# Altium PCB tscnew.PcbDoc
Units mm, origin at the board's own origin, x right, y up, seen from the top; angles counter-clockwise.
Board outline 151 x 86.38 mm, 2 copper layers (Top Layer, Bottom Layer); 69 components, 59 nets, 239 pads, 0 vias.
Unrouted connection lines stored in the file: 14.
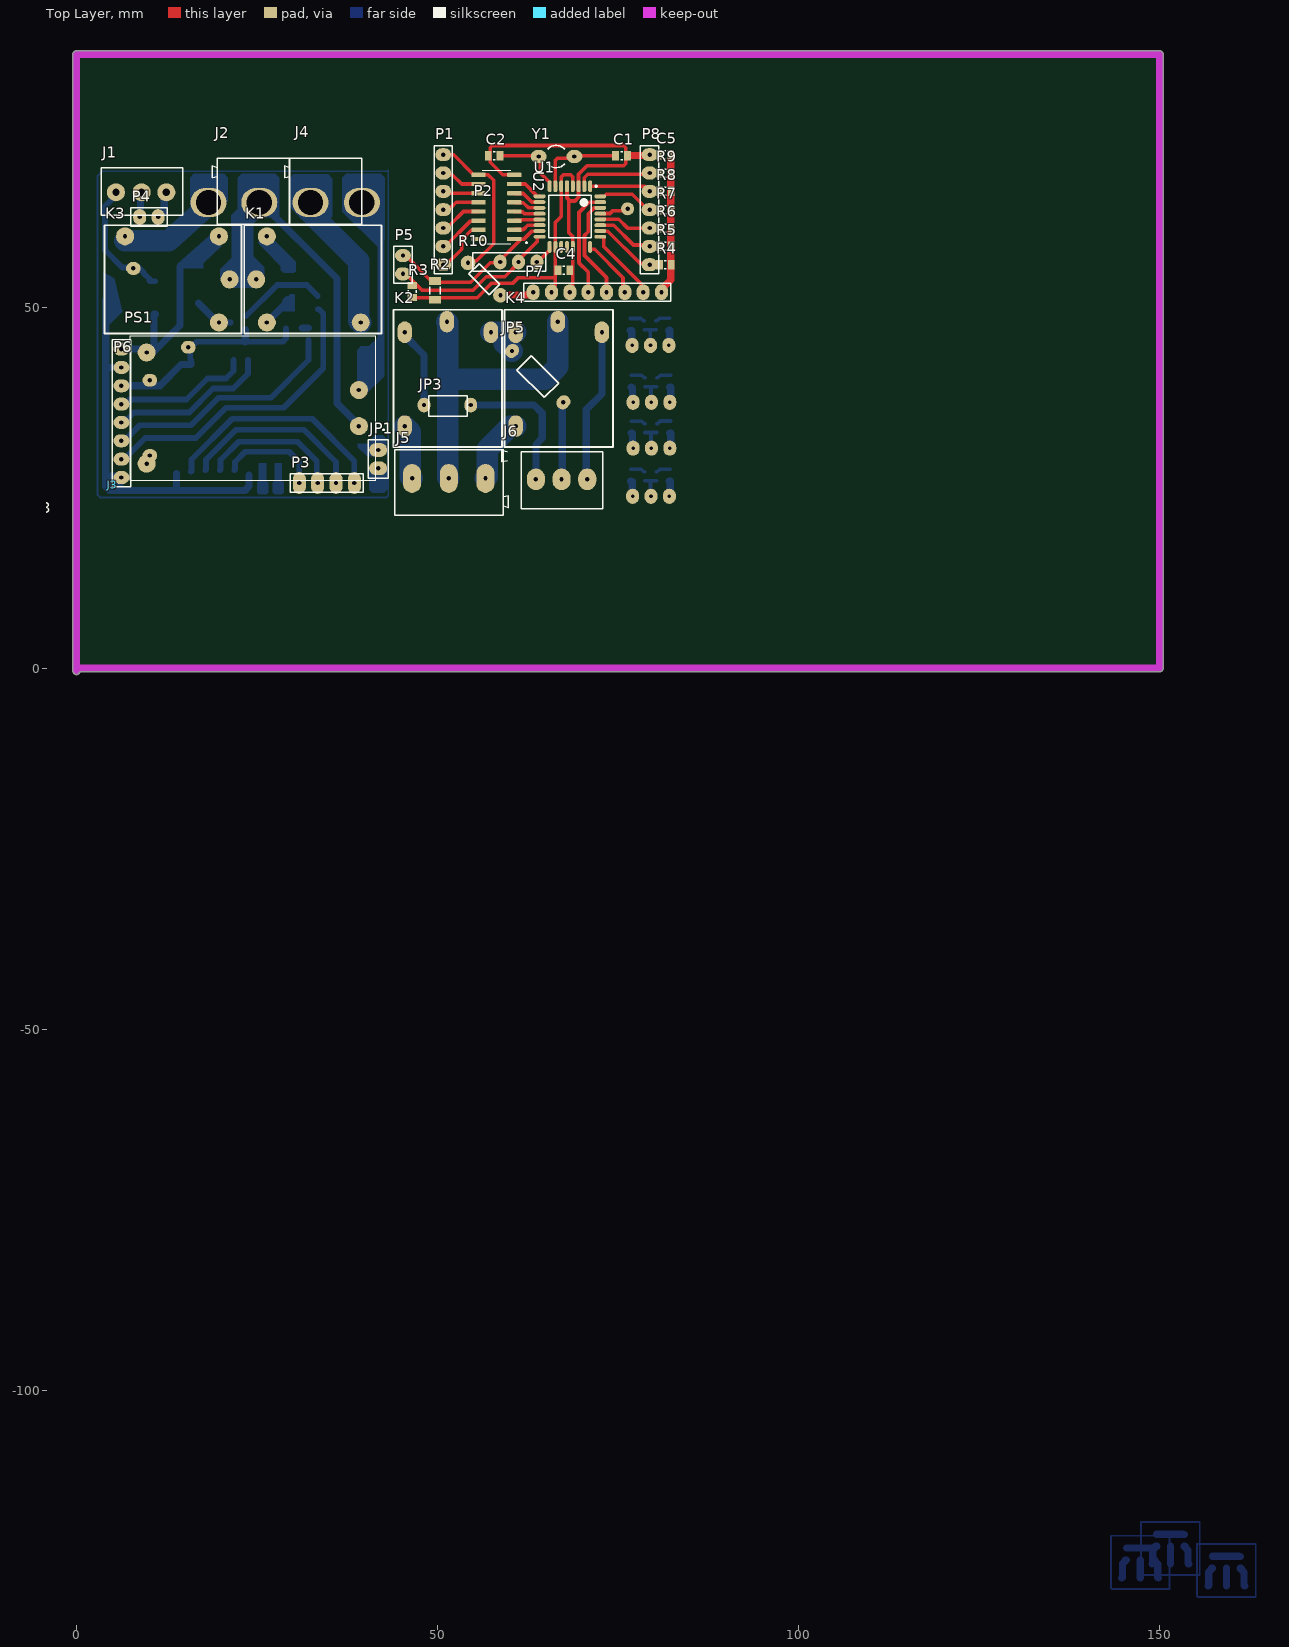
[diagram p0: Top Layer view]
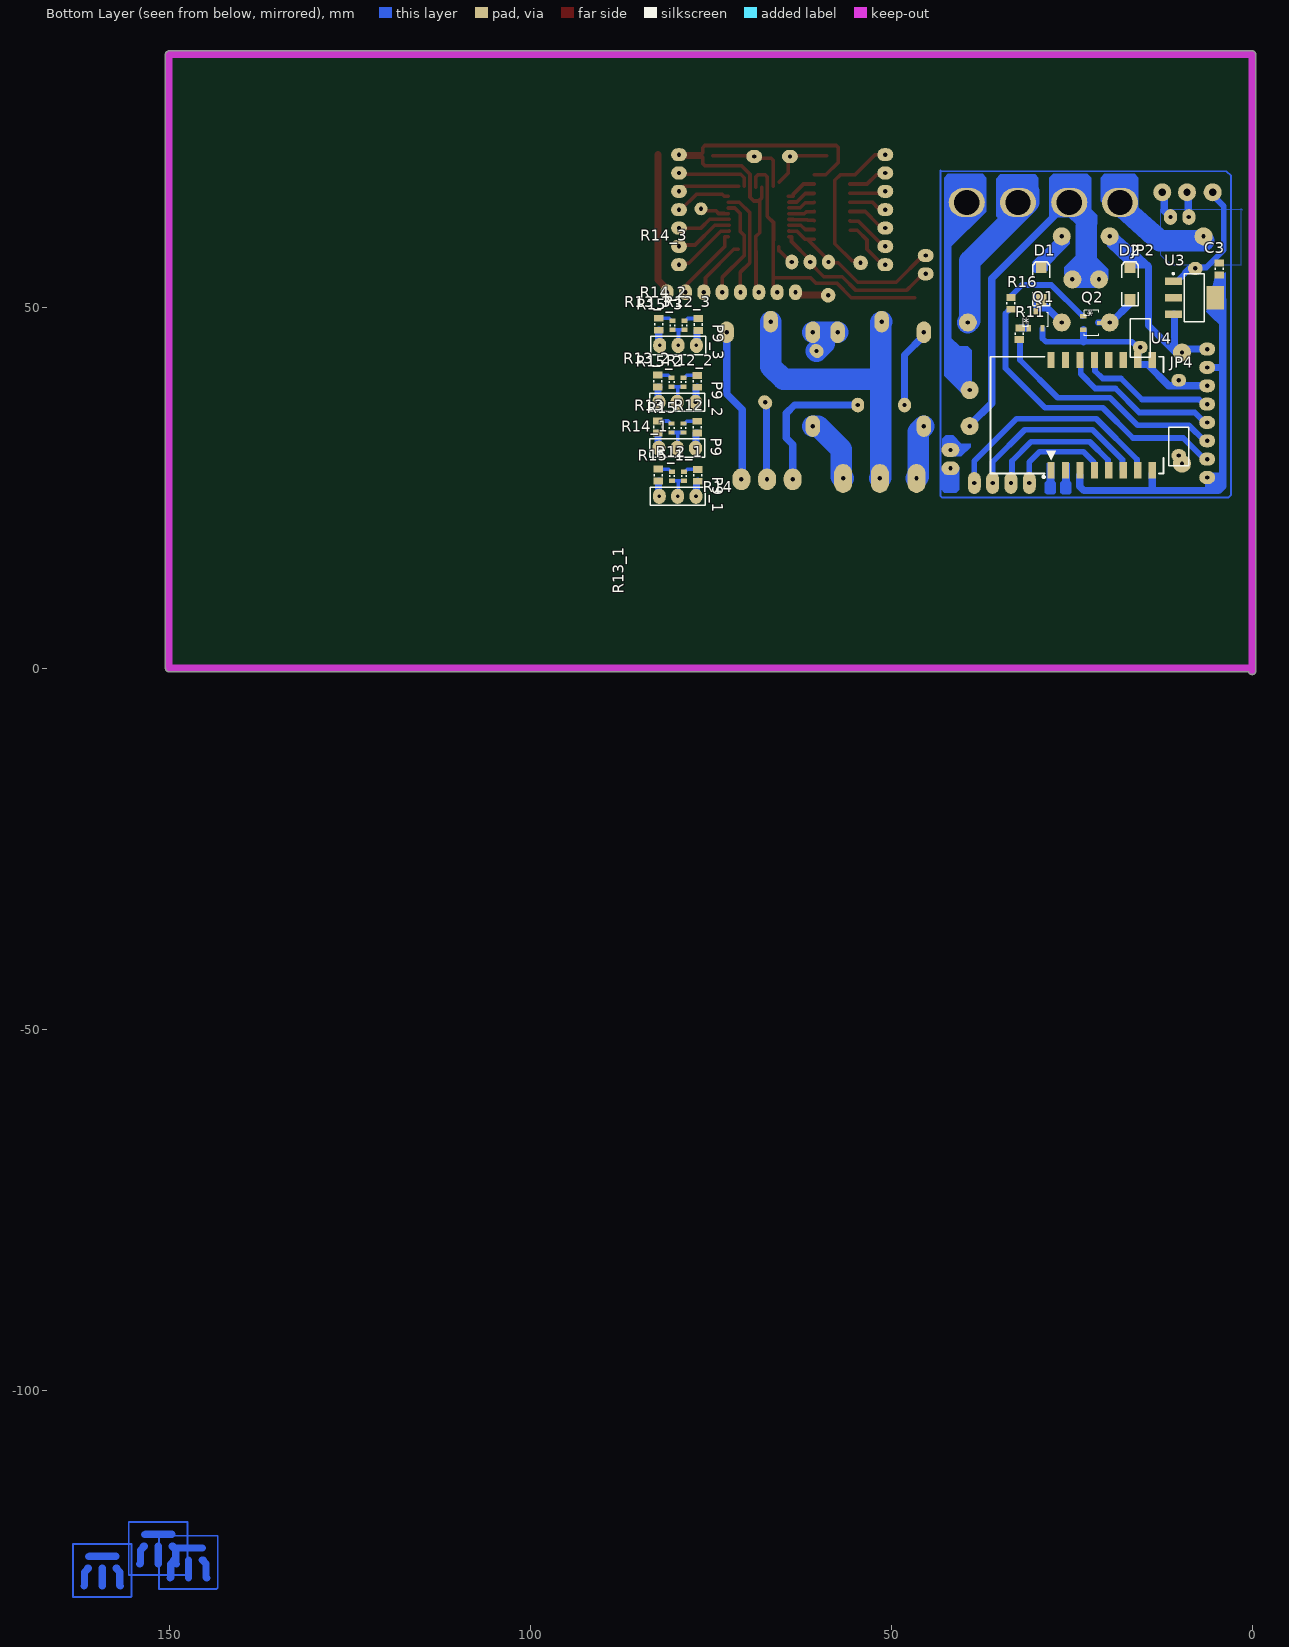
[diagram p1: Bottom Layer view, seen from below]
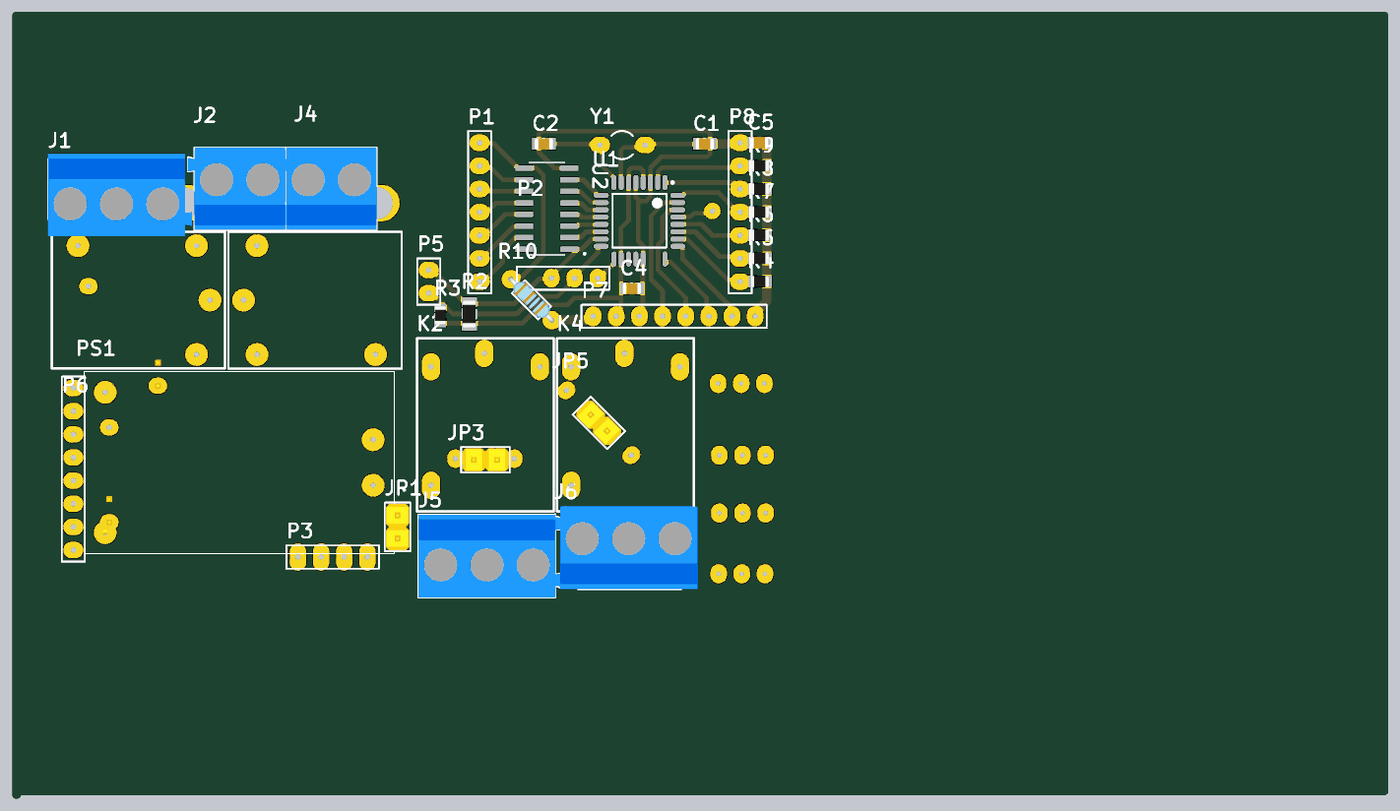
[diagram p2: 3D render of the assembled board from above, using the file's embedded part models]
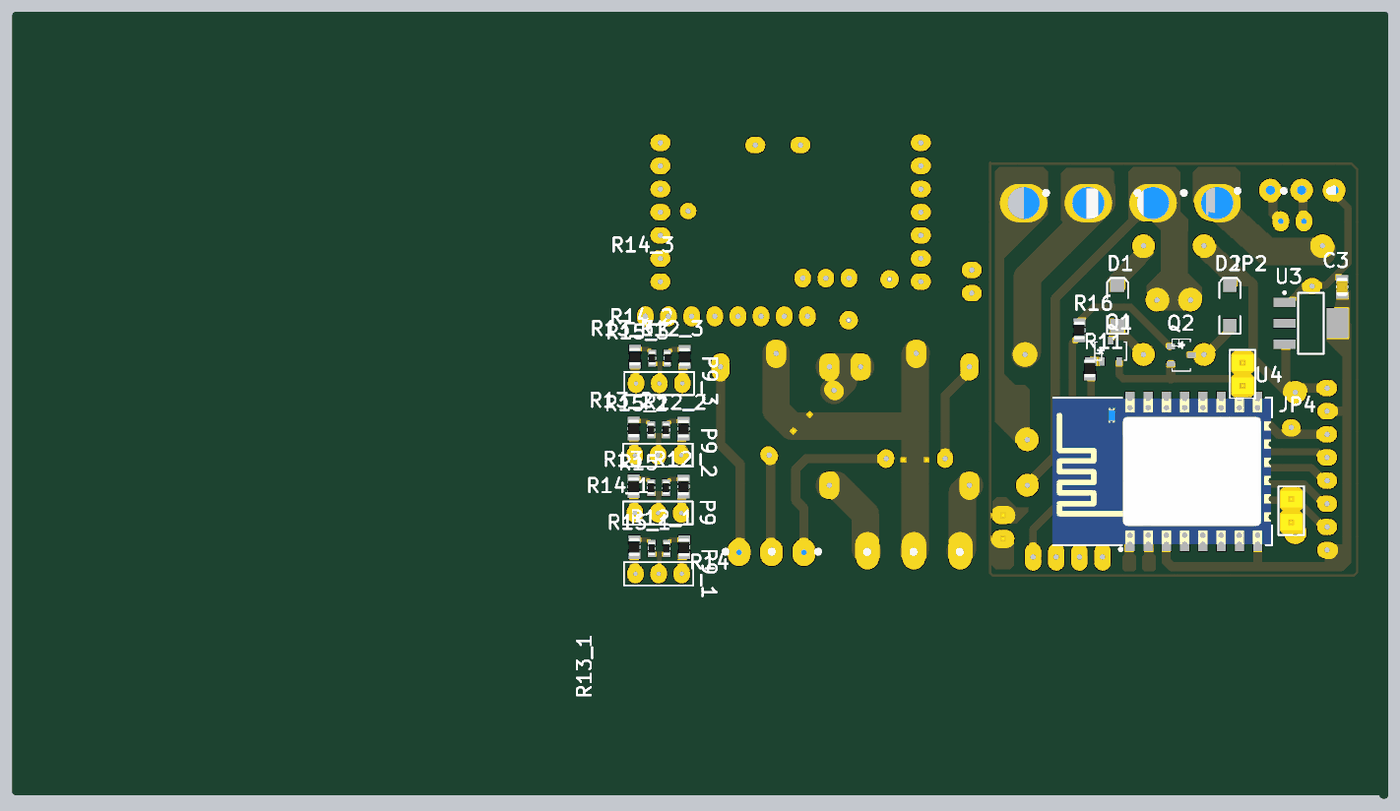
[diagram p3: 3D render of the assembled board from below, using the file's embedded part models]

## Layer stack, top to bottom
Top Solder: solder mask 0.0102, Solder Resist, Dk 3.5
Top Layer: signal copper 0.0356
Dielectric 1: dielectric 0.32, FR-4, Dk 4.8
Bottom Layer: signal copper 0.0356
Bottom Solder: solder mask 0.0102, Solder Resist, Dk 3.5

## Board outline
-0.5,-0.381 -0.5,85 cw(c0,85) 0,85.5 150,85.5 cw(c150,85) 150.5,85 150.5,0 cw(c150,0) 150,-0.5 0.486,-0.5 cw(c0,-0.381)

## Design rules (kind name [scope] priority, off if disabled: settings)
Clearance Clearance_1 [InPolygon] p1: gap=0.8 ignorepadtopadclearanceinfootprint=FALSE
Clearance [All] p2: gap=0.254 ignorepadtopadclearanceinfootprint=FALSE except(0: Arc-Hole Track-Hole SMDPad-Hole THPad-Hole Via-Hole Fill-Hole Poly-Hole Region-Hole Text-Hole)
PolygonConnect [All] p1: connectstyle=Relief reliefconductorwidth=0.254 reliefentries=4 polygonreliefangle="90 Angle" airgapwidth=0.254
RoomDefinition tscnew [InComponentClass('tscnew')] p1: confinementstyle=ConfineIn formatcopy=TRUE lockcomponents=FALSE outline 144.907,-4.953 247.904,-4.953 247.904,23.114 144.907,23.114
RoutingLayers [All] p1: top layer_v5=FALSE bottom layer_v5=TRUE
RoutingVias [All] p1: holewidth=0.711 width=2.5 viastyle="Through Hole" minholewidth=0.711 minwidth=1.27 maxholewidth=0.711 maxwidth=2
SolderMaskExpansion [All] p1: expansion=0.102 istentingtop=FALSE
Width [All] p1: maxlimit=3 minlimit=0.5 preferedwidth=1
29 further rules are at their usual default settings.

## Components (designator, comment, footprint, x,y, rotation, side; value= is the part's Value field where it differs from the comment)
C1 "=Value" "CAP 0805" 75.438,70.993 r180 top
C2 "=Value" "CAP 0805" 57.912,70.993 r0 top
C3 "=Value" "CAP 0805" 4.572,55.372 r90 bottom
C4 "=Value" "CAP 0805" 67.564,55.118 r0 top
C5 "=Value" "CAP 0805" 81.407,71.12 r180 top
D1 "D Tunnel1" 3.2X1.6X1.1 29.21,53.086 r90 bottom
D2 "D Tunnel1" 3.2X1.6X1.1 16.891,53.086 r90 bottom
J1 "TBlock-3" "KF300-3 PIN"#1 16.002,65.913 r270 top
J2 "TBlock-2" "KF300-2 PIN"#1 21.971,65.532 r90 top
J3 "TBlock-4" "KF300-4 PIN" 4.953,25.4 r180 top
J4 "TBlock-2" "KF300-2 PIN"#2 32.004,65.532 r90 top
J5 "TBlock-3" "KF300-3 PIN"#2 56.642,26.289 r270 top
J6 "TBlock-3" "KF300-3 PIN"#3 62.103,26.162 r90 top
JP1 "Jumper" "Header 2X1"#1 41.783,28.956 r90 top
JP2 "Jumper" "Header 2X1"#2 15.494,45.72 r90 bottom
JP3 "Jumper" "Header 2X1"#3 51.435,36.322 r0 top
JP4 "Jumper" "Header 2X1"#4 10.16,30.734 r90 bottom
JP5 "Jumper" "Header 2X1"#5 63.881,40.386 r315 top
K1 "Relay-12vDC" Relays#1 23.241,61.341 r270 top
K2 "Relay-12vDC" Relays#2 58.928,49.657 r180 top
K3 "Relay-12vDC" Relays#1 22.86,46.355 r90 top
K4 "Relay-12vDC" Relays#2 74.295,49.657 r180 top
P1 "Header 7" HDR1X7 50.8,71.12 r270 top
P2 "Header 4" HDR1X4#1 63.754,56.261 r180 top
P3 "Header 4" HDR1X4#2 38.481,25.654 r180 top
P4 "Header 2" HDR1X2 8.763,62.492 r0 top
P5 "Header 2" HDR1X2 45.212,57.15 r270 top
P6 "Header 8" HDR1X8 6.223,26.416 r90 top
P7 "Header 8" HDR1X8 81.026,52.07 r180 top
P8 "Header 7" HDR1X7 79.375,55.88 r90 top
P9 "Header 3" HDR1X3 82.169,30.48 r180 bottom
P9_1 "Header 3" HDR1X3 82.105,23.812 r180 bottom (schematic designator P9)
P9_2 "Header 3" HDR1X3 82.169,36.83 r180 bottom (schematic designator P9)
P9_3 "Header 3" HDR1X3 82.042,44.704 r180 bottom (schematic designator P9)
PS1 "HLK-PM01" HLKPM01 39.116,33.528 r180 top
Q1 "MMBT3904-TP" SOT23-3 31.242,48.26 r180 bottom
Q2 "MMBT3904-TP" SOT23-3 22.218,49.083 r270 bottom
R2 "10K" "RES 1206 (3216X08L)" 49.657,52.324 r90 top
R3 "10K" "RES 0805 (2012X06L)"#1 46.482,52.197 r90 top
R4 "10K" "RES 0805 (2012X06L)"#1 81.534,55.88 r180 top
R5 "10K" "RES 0805 (2012X06L)"#1 81.534,58.42 r180 top
R6 "10K" "RES 0805 (2012X06L)"#1 81.534,60.96 r180 top
R7 "10K" "RES 0805 (2012X06L)"#1 81.534,63.5 r180 top
R8 "10K" "RES 0805 (2012X06L)"#1 81.534,66.04 r180 top
R9 "10K" "RES 0805 (2012X06L)"#1 81.534,68.58 r180 top
R10 "10K" Res-(1/4) 56.474,53.889 r135 top
R11 "10K" "RES 0805 (2012X06L)"#2 32.258,46.355 r90 bottom
R12 "10K" "RES 0805 (2012X06L)"#1 76.835,33.401 r90 bottom
R12_1 "10K" "RES 0805 (2012X06L)"#1 76.772,26.733 r90 bottom (schematic designator R12)
R12_2 "10K" "RES 0805 (2012X06L)"#1 76.835,39.751 r90 bottom (schematic designator R12)
R12_3 "10K" "RES 0805 (2012X06L)"#1 76.708,47.625 r90 bottom (schematic designator R12)
R13 "10K" "RES 0805 (2012X06L)"#1 82.296,33.401 r270 bottom
R13_1 "10K" "RES 0805 (2012X06L)"#1 82.233,26.733 r270 bottom (schematic designator R13)
R13_2 "10K" "RES 0805 (2012X06L)"#1 82.296,39.751 r270 bottom (schematic designator R13)
R13_3 "10K" "RES 0805 (2012X06L)"#1 82.169,47.625 r270 bottom (schematic designator R13)
R14 "10K" "RES 0603 (1608X06L)" 78.74,33.274 r90 bottom
R14_1 "10K" "RES 0603 (1608X06L)" 78.676,26.607 r90 bottom (schematic designator R14)
R14_2 "10K" "RES 0603 (1608X06L)" 78.74,39.624 r90 bottom (schematic designator R14)
R14_3 "10K" "RES 0603 (1608X06L)" 78.613,47.498 r90 bottom (schematic designator R14)
R15 "10K" "RES 0603 (1608X06L)" 80.391,33.274 r90 bottom
R15_1 "10K" "RES 0603 (1608X06L)" 80.328,26.607 r90 bottom (schematic designator R15)
R15_2 "10K" "RES 0603 (1608X06L)" 80.391,39.624 r90 bottom (schematic designator R15)
R15_3 "10K" "RES 0603 (1608X06L)" 80.264,47.498 r90 bottom (schematic designator R15)
R16 "10K" "RES 0805 (2012X06L)"#1 33.401,50.546 r90 bottom
U1 "ATmega8-16AC" 32A_N 68.335,62.554 r270 top
U2 "ULN2003ADRG4" SOIC127P600X175-16N 58.166,63.881 r180 top
U3 "LM1117MP-3.3" MP04A_N 8.001,51.308 r180 bottom
U4 "ESP_12_E" ESP_12_E 27.845,27.047 r90 bottom
Y1 "XTAL" R38 66.421,70.866 r90 top

## Footprints (in the part's own frame and the unit in brackets; to place one, negate y for a bottom-side part, rotate by r counter-clockwise, add the part's x,y. Pads: shape width x height; smd on the part's side, far side on the other; paste and mask are expansions set on the pad)
3.2X1.6X1.1 [mm] "SMT LED; 2 Flat Leads"
  rect 1.5x1.5 smd: 1(-2.032,0) 2(2.413,0)
  silkscreen extent -2.9,-1.15 3.2,1.15
32A_N [mm] "Thin QFP, 32-Leads, Body 7x7mm, Pitch 0.8mm, IPC Medium Density"
  oval 1.65x0.55 smd: 1(-4.2,2.8) 2(-4.2,2) 3(-4.2,1.2) 4(-4.2,0.4) 5(-4.2,-0.4) 6(-4.2,-1.2) 7(-4.2,-2) 8(-4.2,-2.8) 17(4.2,-2.8) 18(4.2,-2) 19(4.2,-1.2) 20(4.2,-0.4) 21(4.2,0.4) 24(4.2,2.8)
  oval 0.55x1.65 smd: 9(-2.8,-4.2) 10(-2,-4.2) 11(-1.2,-4.2) 12(-0.4,-4.2) 13(0.4,-4.2) 14(1.2,-4.2) 15(2,-4.2) 16(2.8,-4.2) 25(2.8,4.2) 26(2,4.2) 27(1.2,4.2) 28(0.4,4.2) 29(-0.4,4.2) 30(-1.2,4.2) 31(-2,4.2) 32(-2.8,4.2)
  silkscreen extent -4.32,-2.95 2.95,3.75, body extent -3.5,-3.5 3.5,3.5, height 1.2
"CAP 0805" [mm]
  rect 0.95x1.3 smd: 1(-0.889,0) 2(0.761,0)
  silkscreen extent -0.21,-0.55 0.09,0.55, body extent -1.08,-0.63 0.95,0.63, height 0.65
ESP_12_E [mm] "ESP-12 Wi-Fi Module by AI-Thinker"
  rect 2.25x1 smd: 1(0.375,0) 2(0.375,-2) 3(0.375,-4) 4(0.375,-6) 5(0.375,-8) 6(0.375,-10) 7(0.375,-12) 8(0.375,-14) 15(15.625,-14) 16(15.625,-12) 17(15.625,-10) 18(15.625,-8) 19(15.625,-6) 20(15.625,-4) 21(15.625,-2) 22(15.625,0)
  silkscreen extent -0.7,-15.57 16.08,8.37, body extent 0,-15.49 16,8.51, height 2.75
HDR1X2 [mm] "Connector; Header; 2 Position"
  oval 1.8x2.2 hole 0.6: 1(0,0) 2(2.54,0)
  silkscreen extent -1.27,-1.27 3.81,1.27
HDR1X3 [mm] "Connector; Header; 3 Position"
  oval 1.8x2.1 hole 0.5: 1(0,0) 2(2.54,0) 3(5.08,0)
  silkscreen extent -1.27,-1.27 6.35,1.27
HDR1X4#1 [mm] "Connector; Header; 4 Position"
  oval 1.8x2.032 hole 0.6: 1(0,0) 2(2.54,0) 3(5.08,0)
  round 1.8 hole 0.6: 4(-12.573,-7.366)
  silkscreen extent -1.27,-1.27 8.89,1.27
HDR1X4#2 [mm] "Connector; Header; 4 Position"
  oval 1.8x3 hole 0.6: 1(0,0) 2(2.54,0) 3(5.08,0) 4(7.62,0)
  silkscreen extent -1.27,-1.27 8.89,1.27
HDR1X7 [mm] "Connector; Header; 7 Position"
  oval 1.8x2.2 hole 0.6: 1(0,0) 2(2.54,0) 3(5.08,0) 4(7.62,0) 5(10.16,0) 6(12.7,0) 7(15.24,0)
  silkscreen extent -1.27,-1.27 16.51,1.27
HDR1X8 [mm] "Connector; Header; 8 Position"
  oval 1.8x2.2 hole 0.6: 1(0,0) 2(2.54,0) 3(5.08,0) 4(7.62,0) 5(10.16,0) 6(12.7,0) 7(15.24,0) 8(17.78,0)
  silkscreen extent -1.27,-1.27 19.05,1.27
"Header 2X1"#1 [mm]
  oval 1.9x2.5 hole 0.6: 1(-1.27,0) 2(1.27,0)
  silkscreen extent -2.67,-1.4 2.67,1.4, body extent -2.54,-1.27 2.54,1.27, height 9.5
"Header 2X1"#2 [mm]
  oval 1.778x2.032 hole 0.6: 1(-1.27,0) 2(9.652,-7.62)
  silkscreen extent -2.67,-1.4 2.67,1.4, body extent -2.54,-1.27 2.54,1.27, height 9.5
"Header 2X1"#3 [mm]
  oval 1.778x2.032 hole 0.6: 1(-3.302,0.127) 2(3.175,0.127)
  silkscreen extent -2.67,-1.4 2.67,1.4, body extent -2.54,-1.27 2.54,1.27, height 9.5
"Header 2X1"#4 [mm]
  oval 1.778x2.032 hole 0.6: 1(-1.27,0) 2(9.144,0)
  silkscreen extent -2.67,-1.4 2.67,1.4, body extent -2.54,-1.27 2.54,1.27, height 9.5
"Header 2X1"#5 [mm]
  oval 1.778x2.032 hole 0.6: 1(-5.029,0) 2(5.029,0)
  silkscreen extent -2.67,-1.4 2.67,1.4, body extent -2.54,-1.27 2.54,1.27, height 9.5
HLKPM01 [mm]
  round 2.5 hole 0.6: 1(0,0) 2(0,-5) 3(29.4,5.2) 4(29.4,-10.2)
  silkscreen extent -3.5,-12.5 31.7,7.5
"KF300-2 PIN"#1 [mm]
  oval 4x5 hole 3.5: 1(-1.032,3.683) 2(-1.032,-3.35)
  silkscreen extent -4.06,-7.49 5.08,3.18, body extent -3.99,-7.5 5.08,3.24, height 12.52
"KF300-2 PIN"#2 [mm]
  oval 4x5 hole 3.5: 1(-1.032,-0.417) 2(-1.032,-7.517)
  silkscreen extent -4.06,-7.49 5.08,3.18, body extent -3.99,-7.5 5.08,3.24, height 12.52
"KF300-3 PIN"#1 [mm]
  round 2.5 hole 1: 1(0,-3.556) 2(0,-6.985) 3(0,-10.541)
  silkscreen extent -3.43,-12.57 3.18,-1.27, body extent -4,-12.57 5.07,3.25, height 12.78
"KF300-3 PIN"#2 [mm]
  oval 4x2.5 hole 0.6: 1(0,0) 2(0,-5.08) 3(0,-10.16)
  silkscreen extent -4.06,-12.57 5.08,3.18, body extent -4,-12.57 5.07,3.25, height 12.78
"KF300-3 PIN"#3 [mm]
  oval 3x2.5 hole 0.6: 1(0,-1.524) 2(0,-5.08) 3(0,-8.636)
  silkscreen extent -4.06,-10.79 4.05,3.18, body extent -4,-12.57 5.07,3.25, height 12.78
"KF300-4 PIN" [mm]
MP04A_N [mm] "SOT223, 4-Leads, Body 6.5x3.5mm, Pitch 2.3mm, Lead Span 7mm, IPC Medium Density"
  rect 2.4x1 smd: 1(-2.9,2.3) 2(-2.9,0) 3(-2.9,-2.3)
  rect 2.4x3.3 smd: 4(2.9,0)
  silkscreen extent -3.03,-3.35 1.4,3.47, body extent -1.85,-3.35 1.85,3.35, height 1.8
R38 [mm] "Crystal, Thru-Hole; 2 Leads; Body 3.1 x 8.2 mm (Dia.xH)"
  oval 1.8x2.2 hole 0.6: 1(0,2.413) 2(0,-2.54)
  silkscreen extent -1.55,-1.19 1.55,1.17
Relays#1 [mm]
  round 2.5 hole 0.6: 1(7.493,1.651) 3(13.462,16.129) 4(1.524,3.127) 5(13.462,3.127)
  silkscreen extent 0,0 15,19
Relays#2 [mm]
  oval 2x3 hole 0.6: 1(7.62,1.651) 3(13.462,16.129) 4(1.524,3.127) 5(13.462,3.127)
  silkscreen extent 0,0 15,19
"RES 0603 (1608X06L)" [mm] "Chip Resistor, 2-Leads, Body 1.6x0.8mm, IPC High Density _ (0.063W)"
  rect 0.6x0.85 smd: 1(-0.635,0) 2(0.609,0)
  silkscreen extent -0.11,-0.33 0.09,0.33, body extent -0.77,-0.38 0.75,0.38, height 0.45
"RES 0805 (2012X06L)"#1 [mm] "Chip Resistor, 2-Leads, Body 2.0x1.3mm, IPC High Density _ (0.100 W)"
  rect 0.95x1.3 smd: 1(-0.838,0) 2(0.812,0)
  silkscreen extent -0.16,-0.55 0.14,0.55, body extent -1.03,-0.63 1,0.64, height 0.6
"RES 0805 (2012X06L)"#2 [mm] "Chip Resistor, 2-Leads, Body 2.0x1.3mm, IPC High Density _ (0.100 W)"
  rect 0.95x1.3 smd: 1(-0.838,0) 2(0.762,-0.127)
  silkscreen extent -0.16,-0.55 0.14,0.55, body extent -1.03,-0.63 1,0.64, height 0.6
"RES 1206 (3216X08L)" [mm] "Chip Resistor, 2-Leads, Body 3.2x1.6mm, IPC High Density _ (0.125 W)"
  rect 1.05x1.7 smd: 1(-1.295,0) 2(1.301,0)
  silkscreen extent -0.5,-0.75 0.5,0.75, body extent -1.52,-0.76 1.53,0.76, height 0.6
Res-(1/4) [mil]
  round 80 hole 23.62: 1(-125,0) 2(125,0)
  silkscreen extent -80,-40 80,40, body extent -135,-36 135,36, height 115
SOIC127P600X175-16N [mm]
  rrect25% 1.97x0.6 smd: 1(-2.475,4.445) 2(-2.475,3.175) 3(-2.475,1.905) 4(-2.475,0.635) 5(-2.475,-0.635) 6(-2.475,-1.905) 7(-2.475,-3.175) 8(-2.475,-4.445) 9(2.475,-4.445) 10(2.475,-3.175) 11(2.475,-1.905) 12(2.475,-0.635) 13(2.475,0.635) 14(2.475,1.905) 15(2.475,3.175) 16(2.475,4.445)
  silkscreen extent -4.25,-5.06 1.95,5.06
SOT23-3 [mm]
  rect 0.6x0.9 smd: 1(0.32,-1.15) 2(2.22,-1.15) 3(1.27,1.15)
  silkscreen extent -0.48,-1 3.02,1

## Part data
C1 C2 C3 C4 C5: library part Capacitor, "Capacitor"
D1 D2: "Tunnel Diode - RLC Model", LatestRevisionDate=17-Jul-2002, LatestRevisionNote="Re-released for DXP Platform.", PackageDescription="SM LED; 2 Flat Leads", PackageReference=3.2X1.6X1.1, PackageVersion=Feb-2002, Published=8-Jun-2000, Publisher="Altium Limited"
K1 K2 K3 K4: library part Relay-05vDC, "Relay-05vDC-240AC 5A", ComponentLinkURL=www.picpars.com, Designer="Seyed Mohsen Ghasemain"
P1 P8: "Header, 7-Pin", LatestRevisionDate=17-Jul-2002, LatestRevisionNote="Re-released for DXP Platform.", Publisher="Altium Limited"
P2 P3: "Header, 4-Pin", LatestRevisionDate=17-Jul-2002, LatestRevisionNote="Re-released for DXP Platform.", Publisher="Altium Limited"
P4 P5: "Header, 2-Pin", LatestRevisionDate=17-Jul-2002, LatestRevisionNote="Re-released for DXP Platform.", Publisher="Altium Limited"
P6 P7: "Header, 8-Pin", LatestRevisionDate=17-Jul-2002, LatestRevisionNote="Re-released for DXP Platform.", Publisher="Altium Limited"
P9 P9_1 P9_2 P9_3: "Header, 3-Pin", LatestRevisionDate=17-Jul-2002, LatestRevisionNote="Re-released for DXP Platform.", Publisher="Altium Limited"
PS1: "<b>Ultra-compact power module</b><p> Source: <a href=\"https://datasheet.lcsc.com/szlcsc/1906201102_HI-LINK-HLK-PM03_C209904.pdf\"> Datasheet </a>", Package="Package Analog Devices", Availability=Unavailable, MF=Hi-link, MP=hlk-pm01, Price=None, SnapEDA_Link=https://www.snapeda.com/parts/hlk-pm01/Hi-link/view-part/2875605/?ref=snap
Q1 Q2: "Bipolar _BJT_ Transistor NPN 40V 200mA 300MHz 350mW Surface Mount SOT-23", Package="SOT-23 Micro Commercial", Availability=Unavailable, MF="Micro Commercial", MP=MMBT3904-TP, Price=None, SnapEDA_Link=https://www.snapeda.com/parts/MMBT3904-TP/Micro%20Commercial/view-part/805928/?ref=snap
R2 R3 R4 R5 R6 R7 R8 R9 R10 R11 R12 R12_1 R12_2 R12_3 R13 R13_1 R13_2 R13_3 R14 R14_1 R14_2 R14_3 R15 R15_1 R15_2 R15_3 R16: library part Resistor, "Resistor", Power="1/4 W", Tolerance=5%
U1: "8-Bit AVR Microcontroller with 8K Bytes of In-System Programmable Flash Memory", Supplier Part Number 1=ATMEGA8-16AC-ND, Code_JEDEC=MS-026-ABA, ComponentLink1Description=Datasheet, ComponentLink1URL=http://www.atmel.com/dyn/resources/prod_documents/doc2486.pdf, ComponentLink2Description="Atmel.com Home", ComponentLink2URL=http://www.atmel.com, DatasheetVersion=2486H-AVR-09/02, LatestRevisionDate=16-Oct-2006, LatestRevisionNote="IPC-7351 Footprint Added.", PackageDescription="32-Lead, 7x7x1.0 mm Body, 0.8mm Lead Pitch, Thin Profile Plastic Quad Flat Package (TQFP)", PackageReference=32A, PackageVersion="revB, Oct-2001", Published=17-Sep-2003, Publisher="Altium Limited", Supplier 1=Digi-Key, Supplier 2=Mouser, Supplier Part Number 2=556-ATMEGA8-16AC
U2: "50-V, 7-ch darlington transistor array, -20C to 70C 16-SOIC -40 to 70", Package=None, Availability=Unavailable, MP=ULN2003ADRG4, Price=None
U3: "800mA Low-Dropout Linear Regulator", DigiKeyPartNumber=LM1117MP-3.3CT-ND, Manufacturer="National Semiconductor", PackageTopMarking=XYTT*N05A, PowerWise=N, Code_IPC=SOT223-4, Code_JEDEC=TO-261-AA, ComponentLink1Description="LM1117 Datasheet", ComponentLink1URL=http://www.national.com/ds/LM/LM1117.pdf, ComponentLink2Description="LM1117 Web Page", ComponentLink2URL=http://www.national.com/pf/LM/LM1117.html, ComponentLink3Description="MP04A Package Page", ComponentLink3URL=http://www.national.com/packaging/folders/mp04a.html, CompType="LDO IC", DatasheetVersion=Apr-2006, PackageDescription="Molded SOT-223, 6.50 x 3.56 x 1.6mm Body, 4 Lead, 2.3mm Pitch", PackageReference=MP04A, PackageVersion="revB, Apr-2003", PartNumber=LM1117MP-3.3, PinCount=4, Published=4-Dec-2008, Publisher="Altium Limited", RoHS=O
U4: "ESP-12 Wi-Fi Module by AI-Thinker", IC=ESP8266-EX, Vendor=Ai-thinker
Y1: "Crystal Oscillator", LatestRevisionDate=17-Jul-2002, LatestRevisionNote="Re-released for DXP Platform.", PackageDescription="Crystal, Thru-Hole; 2 Leads; Body 3.1 x 8.2 mm (Dia.xH)", PackageReference=R38, Published=8-Jun-2000, Publisher="Altium Limited"

## Nets (pads, with @x,y where several pads share a name; then routed paths per layer and width w, separated by ;. In a path a pad name is that pad's centre, name@x,y a point inside that pad or via, vN(x,y) a via of type N, cw(c..) or ccw(c..) an arc to the next point about the centre after c; other vN are vias at no path point)
btn: U4.18
faz: J2.2 K1.1 K3.1 PS1.1 | length 47.1
  Bottom Layer w1: 22.422,61.661 22.422,62.511 ; 22.479,61.722 24.43,63.673 24.43,63.884 25.024,64.478 25.565,64.478 36.068,53.975 36.068,36.703 38.989,33.782 PS1.1@39.116,33.782
  Bottom Layer w3: 22.987,55.626 22.987,61.095
GND: C1.1 C2.1 C3.2 C4.2 C5.2 J1.3 JP2.1 JP2.2 JP4.1 JP4.2 P6.6 P7.6 P8.7 PS1.3 Q1.2 Q2.2 U1.3 U1.5 U1.21 U2.8 U3.1 U4.15 U4.16 | length 105.1
  Top Layer w0.5: U2.8 59.055,68.326 57.299,70.082 57.299,70.993 57.299,72.097 57.592,72.39 75.78,72.39 76.073,72.097 76.073,71.422 76.327,71.168 C1.1 76.102,70.768 76.102,70.329 76.073,70.3 76.073,69.889 75.78,69.596 70.717,69.596 69.535,68.414 U1.3 69.535,65.217 69.031,64.713 68.355,64.713 67.935,65.133 U1.5@67.935,66.627 ; P7.6@68.199,52.07 68.702,52.573 68.702,53.124 68.707,53.129 68.707,57.474 68.714,57.481 68.714,57.748 68.725,57.759 68.725,58.344 U1.21 68.725,58.364 68.725,59.799 68.199,60.325 68.199,64.869
  Top Layer w1: C1.1@76.454,70.993 79.248,70.993 P8.7
  Bottom Layer w0.8: J1.3 5.461,65.496 3.937,63.972 3.937,57.912 6.35,55.499 7.944,55.499 8.011,55.432 8.692,55.432 9.331,54.793 9.331,54.677 10.101,53.907 10.101,53.708 10.201,53.608 U3.1 ; U4.16 15.745,42.772 15.745,44.32 16.637,45.212 23.368,45.212 28.566,45.212 29.035,45.681 Q1.2@29.035,47.06
  Bottom Layer w1: P6.6 11.557,39.116 14.488,42.047 15.845,42.047 U4.16@15.845,42.428 ; PS1.3@9.582,28.194 PS1.3 ; 23.368,45.212 Q2.2
i13: P8.6 R9.2 U1.2 | length 10.4
  Top Layer w0.5: U1.2 70.345,66.764 70.345,67.932 70.807,68.394 79.294,68.394 P8.6@79.353,68.453
i14: P8.5 R8.2 U1.1 | length 8.5
  Top Layer w0.5: U1.1 78.661,66.754 P8.5
i15: P8.4 R7.2 U1.32 | length 7.9
  Top Layer w0.5: U1.32 73.098,65.354 73.403,65.659 76.962,65.659 79.121,63.5 P8.4
i16: P8.3 R6.2 U1.28 | length 7.5
  Top Layer w0.5: U1.28@72.423,62.164 73.108,62.164 73.12,62.175 75.112,62.175 76.327,60.96 P8.3
i17: P8.2 R5.2 U1.27 | length 8.2
  Top Layer w0.5: U1.27@72.395,61.344 73.13,61.344 73.133,61.341 74.422,61.341 77.148,58.615 79.18,58.615 P8.2
i18: P8.1 R4.2 U1.26 | length 8.9
  Top Layer w0.5: U1.26@72.433,60.564 72.452,60.544 73.13,60.544 73.141,60.533 73.579,60.533 78.037,56.075 79.18,56.075 P8.1
NetC1_2: C1.2 U1.7 Y1.2 | length 12.2
  Top Layer w0.5: U1.7 66.325,66.764 66.325,67.349 66.314,67.36 66.314,70.319 66.607,70.612 68.239,70.612 68.493,70.866 Y1.2 69.088,70.993 C1.2
NetC2_2: C2.2 U1.8 Y1.1 | length 8.9
  Top Layer w0.5: C2.2@58.927,70.993 63.159,70.993 63.54,70.612 Y1.1@64.008,70.612 ; Y1.1@64.008,70.358 64.247,70.119 64.247,68.578 65.496,67.329 U1.8@65.512,67.314
NetD1_1: D1.1 K1.5 Q1.3 | length 4.4
  Bottom Layer w1: K1.5 28.96,50.471 28.96,50.804 D1.1
NetD2_1: D2.1 K3.4 Q2.3 | length 5.6
  Bottom Layer w0.8: K3.4@19.79,47.94 19.856,47.874 21.068,47.874 Q2.3@21.379,47.874
  Bottom Layer w1: D2.1@16.891,50.546 19.558,47.879 K3.4
NetJ5_1: J5.1 K4.3 | length 9.4
  Bottom Layer w3: J5.1 56.892,26.539 56.892,30.349 60.071,33.528 K4.3
NetJ5_2: J5.2 K2.1 K4.1 | length 44
  Bottom Layer w3: K2.1 51.435,47.879 51.435,40.005 ; J5.2 51.435,26.416 51.435,40.005 ; K4.1 66.675,41.783 64.897,40.005 51.435,40.005
NetJ5_3: J5.3 K2.3 | length 7.7
  Bottom Layer w3: K2.3 46.232,32.762 46.232,26.539 J5.3
NetJ6_1: J6.1 JP3.2 | length 19.9
  Bottom Layer w1: JP3.2 63.373,36.449 64.516,35.306 64.516,31.877 63.627,30.988 J6.1
NetJ6_2: J6.2 JP5.2 | length 10.8
  Bottom Layer w1: J6.2 67.265,26.244 67.265,36.658 JP5.2
NetJ6_3: J6.3 K4.4 | length 21
  Bottom Layer w1: J6.3@70.612,26.416 70.612,35.814 72.771,37.973 K4.4
NetJP3_1: JP3.1 K2.5 | length 11.2
  Bottom Layer w1: K2.5 45.466,46.03 48.133,43.363 JP3.1
NetJP5_1: JP5.1 K2.4 K4.5 | length 4.9
  Bottom Layer w3: K2.4 K4.5 ; 59.285,44.982 JP5.1
NetP2_1: P2.1 U1.17 | length 3
  Top Layer w0.5: P2.1 63.881,56.261 65.414,57.794 65.512,57.794 65.535,57.818 U1.17
NetP3_1: P3.1 U4.7 | length 33.2
  Bottom Layer w0.8: U4.7@15.875,27.217 15.945,27.287 15.945,28.899 21.59,34.544 32.639,34.544 38.481,28.702 P3.1@38.481,24.535
NetP3_2: P3.2 U4.6 | length 26
  Bottom Layer w0.8: U4.6 17.945,27.522 17.945,28.867 22.098,33.02 31.496,33.02 35.941,28.575 P3.2
NetP3_3: P3.3 U4.5 | length 20.2
  Bottom Layer w0.8: U4.5 19.945,27.522 19.945,28.835 22.479,31.369 30.607,31.369 33.274,28.702 P3.3@33.274,25.396
NetP3_4: P3.4 U4.4 | length 14.9
  Bottom Layer w0.8: U4.4 21.945,27.522 21.945,28.549 23.368,29.972 29.464,29.972 30.861,28.575 P3.4@30.861,24.958
NetP9_1: P9.1 R13.2 | length 2.3
  Bottom Layer w1: P9.1 82.296,30.607 R13.2@82.296,32.564 ; R13.2@82.169,32.564 82.194,32.589 R13.2
NetP9_2: P9.2 R14.1 R15.1 | length 3.8
  Bottom Layer w0.5: R14.1 79.566,32.639 ; P9.2 79.566,30.543 79.566,32.639 ; R15.1 79.566,32.639
NetP9_3: P9.3 R12.1 | length 2.2
  Bottom Layer w1: R12.1 76.873,32.563 R12.1@76.898,32.538 ; R12.1@77.025,32.538 77.025,30.543 P9.3
NetQ1_1: Q1.1 R11.2 | length 0.9
  Bottom Layer w1: 31.242,47.11 32.124,47.11 R11.2
NetQ2_1: Q2.1 R16.2 | length 12.3
  Bottom Layer w0.8: Q2.1@23.49,48.763 27.813,53.086 31.877,53.086 R16.2@33.401,51.562
NetR12_2: R12.2 R14.2 | length 2
  Bottom Layer w0.5: R12.2 78.286,34.213 78.615,33.883 R14.2
NetR13_1: R13.1 R15.2 | length 2.1
  Bottom Layer w0.5: R15.2 80.516,33.883 80.872,34.239 R13.1
nol: J4.2 PS1.2 | length 29.4
  Bottom Layer w1: J4.2@39.497,65.913 42.164,63.246 42.164,40.687 PS1.2@40.005,38.528
o1: P2.3 P5.1 P6.2 R2.2 R16.1 U1.15 U2.1 | length 65.9
  Top Layer w0.5: P5.1 45.593,57.15 49.276,53.467 50.673,53.467 54.61,53.467 57.317,56.174 58.587,56.174 P2.3 58.674,56.515 60.325,58.166 U2.1@61.461,59.301 ; U2.1 61.461,59.436 61.976,59.436 63.084,60.544 64.125,60.544 U1.15
  Bottom Layer w0.8: P6.2@6.246,29.15 6.798,29.15 9.525,31.877 16.51,31.877 20.701,36.068 28.702,36.068 34.163,41.529 34.163,49.121 33.576,49.708 R16.1
o2: P2.2 P5.2 P6.3 R3.2 R11.1 U1.16 | length 56.9
  Top Layer w0.5: P5.2 45.593,54.61 46.94,53.263 47.879,52.324 54.864,52.324 56.769,54.229 59.309,54.229 61.214,56.134 61.214,56.515 63.794,59.095 63.794,59.731 63.817,59.754 U1.16
  Bottom Layer w0.8: P6.3 6.604,31.496 8.763,33.655 15.875,33.655 19.685,37.465 26.924,37.465 32.131,42.672 R11.1@32.131,45.442
o3: U1.9 U2.7 | length 4.4
  Top Layer w0.5: U2.7 62.133,67.056 63.575,65.613 63.575,65.377 U1.9@64.244,65.377
o4: U1.10 U2.6 | length 4
  Top Layer w0.5: U2.6 60.688,65.739 61.896,65.739 63.071,64.564 64.125,64.564 U1.10
o5: U1.11 U2.5 | length 3.8
  Top Layer w0.5: U2.5 60.688,64.469 61.896,64.469 62.601,63.764 64.125,63.764 U1.11
o6: U1.12 U2.4 | length 3.6
  Top Layer w0.5: U2.4 60.691,63.196 61.772,63.196 62.024,62.944 64.125,62.944 U1.12
o7: U1.13 U2.3 | length 3.6
  Top Layer w0.5: U2.3 60.691,62.026 61.562,62.026 61.669,62.133 63.529,62.133 63.54,62.144 64.125,62.144 U1.13
o8: U1.14 U2.2 | length 3.8
  Top Layer w0.5: U2.2 60.691,60.756 61.899,60.756 62.497,61.354 U1.14
o13: P1.2 U2.10 | length 5.5
  Top Layer w0.5: P1.2 51.017,68.363 52.033,68.363 53.34,67.056 U2.10
o14: P1.3 U2.11 | length 5
  Top Layer w0.5: P1.3 51.071,66.04 51.325,65.786 U2.11
o15: P1.4 U2.12 | length 5.3
  Top Layer w0.5: P1.4 51.049,63.749 51.811,63.749 52.578,64.516 U2.12
o16: P1.5 U2.13 | length 5.8
  Top Layer w0.5: P1.5 51.268,60.96 51.739,61.431 51.779,61.431 53.594,63.246 U2.13
o17: P1.6 U2.14 | length 6.4
  Top Layer w0.5: P1.6 51.054,58.42 54.56,61.926 55.641,61.926 U2.14
o18: P1.7 U2.15 | length 7.6
  Top Layer w0.5: P1.7 51.181,55.88 53.34,58.039 53.34,59.309 54.687,60.656 U2.15@55.641,60.656
q1: P6.5 P7.5 U1.31 U4.19 | length 34
  Top Layer w0.5: P7.5@70.866,52.197 70.866,54.864 69.596,56.134 69.596,63.119 71.031,64.554 U1.31
  Bottom Layer w0.8: P6.5 6.694,36.576 7.329,37.211 15.24,37.211 18.161,40.132 20.701,40.132 21.745,41.176 21.745,42.648 U4.19@21.795,42.697
q2: P6.4 P7.4 U1.30 U4.20 | length 36.6
  Top Layer w0.5: U1.30 72.525,63.744 71.674,63.744 70.866,62.937 70.866,60.452 70.356,59.942 70.356,57.152 73.406,54.102 P7.4
  Bottom Layer w0.8: P6.4 6.556,34.036 7.953,35.433 15.621,35.433 18.923,38.735 21.717,38.735 23.749,40.767 U4.20@23.749,42.671
q3: P7.3 U1.24 | length 8
  Top Layer w0.5: U1.24@71.158,58.007 71.787,58.007 75.697,54.097 75.697,52.446 P7.3@75.824,52.319
q4: P7.2 U1.25 | length 10.1
  Top Layer w0.5: U1.25@72.535,59.775 73.001,59.775 73.045,59.731 73.045,58.4 78.237,53.208 78.237,52.446 P7.2@78.364,52.319
q11: J4.1 K1.3 | length 21.7
  Bottom Layer w3: J4.1@30.943,66.067 30.943,64.561 39.116,56.388 39.116,48.133 K1.3
q12: J2.1 K3.3 | length 14.6
  Bottom Layer w3: K3.3@6.731,59.182 12.755,59.182 17.78,63.666 J2.1@17.78,65.532
rst: P2.4 U1.29 U4.1 | length 3.9
  Top Layer w0.5: U1.29 72.545,62.964 73.13,62.964 73.141,62.975 73.897,62.975 74.3,63.378 75.726,63.378 P2.4@76.073,63.725
s1: J1.1 P4.2 | length 4
  Bottom Layer w1: P4.2@11.303,62.357 P4.2 12.159,63.348 12.159,65.626 J1.1
s2: J1.2 P4.1 | length 3.7
  Bottom Layer w1: P4.1@8.763,62.357 8.859,62.453 8.859,65.755 J1.2
VCC: D1.2 D2.2 K1.4 K3.5 P1.1 P6.8 P7.8 PS1.4 R10.1 R10.2 U2.9 U3.3 | length 61
  Top Layer w0.5: P1.1 50.819,71.101 52.231,71.101 54.991,68.341 57.008,68.341 57.785,67.564 57.785,58.801 55.411,56.427 54.522,56.427 R10.2
  Top Layer w1: R10.1@58.799,51.689 62.387,51.689 62.415,51.717 63.02,51.717 P7.8@63.373,52.07
  Bottom Layer w1: P6.8 9.731,44.196 10.199,43.728 10.605,43.728 PS1.4@10.753,43.876 ; U3.3 10.753,49.008 PS1.4@10.753,43.876 ; K3.5@19.177,59.944 14.351,55.637 14.351,49.022 14.337,49.008 14.337,47.46 PS1.4@10.753,43.876 ; K1.4 26.575,59.61 26.575,58.134 D1.2@28.575,56.134
vesp: C3.1 C4.1 C5.1 P6.1 P6.7 P7.1 P7.7 R2.1 R3.1 R4.1 R5.1 R6.1 R7.1 R8.1 R9.1 U1.4 U1.6 U1.18 U3.2 U3.4 U4.3 U4.8 | length 114
  Top Layer w0.5: R3.1@46.736,51.308 50.673,51.308 55.499,51.308 57.531,53.34 60.452,53.34 61.214,54.102 66.314,54.102 ; P7.7@65.659,52.341 66.314,52.996 66.314,54.102 ; U1.18@66.314,58.404 66.314,54.102 ; U1.18 66.325,58.364 66.325,58.949 66.314,58.96 66.314,59.227 66.294,59.247 66.294,61.722 67.145,62.573 67.145,66.744 U1.6 67.135,67.318 67.156,67.339 67.156,68.033 67.449,68.326 68.442,68.326 68.735,68.033 U1.4@68.735,66.627
  Top Layer w1: P7.1 81.026,52.486 82.296,53.756 C5.1
  Bottom Layer w0.5: 6.223,24.595 P6.1
  Bottom Layer w1: U3.4@4.064,51.082 4.064,41.656 ; P6.7 4.064,41.656 ; U4.8@13.845,26.933 13.845,26.504 13.843,26.502 13.843,24.595 ; U4.3@23.876,26.741 23.876,25.181 23.29,24.595 13.843,24.595 ; 4.064,41.656 4.064,25.181 4.65,24.595 6.223,24.595 13.843,24.595
pads on no net: JP1.1 JP1.2 P9_1.1 P9_1.2 P9_1.3 P9_2.1 P9_2.2 P9_2.3 P9_3.1 P9_3.2 P9_3.3 R12_1.1 R12_1.2 R12_2.1 R12_2.2 R12_3.1 R12_3.2 R13_1.1 R13_1.2 R13_2.1 R13_2.2 R13_3.1 R13_3.2 R14_1.1 R14_1.2 R14_2.1 R14_2.2 R14_3.1 R14_3.2 R15_1.1 R15_1.2 R15_2.1 R15_2.2 R15_3.1 R15_3.2 U1.19 U1.20 U2.16 U4.2 U4.17 U4.21 U4.22
copper on no net: | length 335.9
  Bottom Layer w0.254: 2.921,24.003 2.921,68.199 3.556,68.834 43.053,68.834 43.18,68.961 43.18,68.834 43.18,23.876 42.926,23.622 3.302,23.622 2.921,24.003 ; 143.256,-127.381 143.256,-120.142 143.51,-120.142 151.384,-120.142 151.384,-127.508 143.383,-127.508 143.256,-127.381 ; 147.447,-125.476 147.447,-118.237 147.701,-118.237 155.575,-118.237 155.575,-125.603 147.574,-125.603 147.447,-125.476 ; 155.194,-128.524 155.194,-121.285 155.448,-121.285 163.322,-121.285 163.322,-128.651 155.321,-128.651 155.194,-128.524
  Bottom Layer w0.5: 76.708,48.437 78.159,48.437 78.488,48.107 78.613,48.107 ; 76.772,27.545 78.222,27.545 78.551,27.216 78.676,27.216 ; 76.835,40.563 78.286,40.563 78.615,40.233 78.74,40.233 ; 78.613,46.863 79.438,46.863 ; 78.676,25.971 79.502,25.971 ; 78.74,38.989 79.566,38.989 ; 79.502,44.704 79.438,44.767 79.438,46.863 ; 79.566,23.812 79.502,23.876 79.502,25.971 ; 79.629,36.83 79.566,36.893 79.566,38.989 ; 80.264,46.863 79.438,46.863 ; 80.264,48.107 80.389,48.107 80.745,48.463 82.169,48.463 ; 80.328,25.971 79.502,25.971 ; 80.328,27.216 80.453,27.216 80.808,27.572 82.233,27.572 ; 80.391,38.989 79.566,38.989 ; 80.391,40.233 80.516,40.233 80.872,40.589 82.296,40.589
  Bottom Layer w1: 76.708,46.787 76.746,46.787 76.772,46.762 ; 76.772,25.895 76.81,25.895 76.835,25.87 ; 76.835,38.913 76.873,38.913 76.898,38.888 ; 76.898,46.762 76.898,44.767 76.962,44.704 ; 76.962,25.87 76.962,23.876 77.025,23.812 ; 77.025,38.888 77.025,36.893 77.089,36.83 ; 82.042,44.704 82.169,44.831 82.169,46.788 ; 82.042,46.788 82.067,46.813 82.169,46.813 ; 82.105,23.812 82.233,23.939 82.233,25.897 ; 82.105,25.897 82.131,25.922 82.233,25.922 ; 82.169,36.83 82.296,36.957 82.296,38.914 ; 82.169,38.914 82.194,38.939 82.296,38.939 ; 144.78,-125.984 144.876,-125.888 144.876,-124.033 145.265,-123.644 145.265,-123.519 145.29,-123.494 145.415,-123.494 ; 145.415,-121.844 149.074,-121.844 149.1,-121.87 149.225,-121.87 ; 147.32,-125.984 147.32,-123.52 ; 148.971,-124.079 149.067,-123.983 149.067,-122.128 149.456,-121.739 149.456,-121.614 149.481,-121.589 149.606,-121.589 ; 149.225,-123.52 149.35,-123.52 149.375,-123.545 149.375,-123.67 149.764,-124.06 149.764,-125.888 149.86,-125.984 ; 149.606,-119.939 153.265,-119.939 153.291,-119.965 153.416,-119.965 ; 151.511,-124.079 151.511,-121.615 ; 153.416,-121.615 153.541,-121.615 153.566,-121.64 153.566,-121.765 153.955,-122.155 153.955,-123.983 154.051,-124.079 ; 156.718,-127.127 156.814,-127.031 156.814,-125.176 157.203,-124.787 157.203,-124.662 157.228,-124.637 157.353,-124.637 ; 157.353,-122.987 161.012,-122.987 161.038,-123.013 161.163,-123.013 ; 159.258,-127.127 159.258,-124.663 ; 161.163,-124.663 161.288,-124.663 161.313,-124.688 161.313,-124.813 161.702,-125.203 161.702,-127.031 161.798,-127.127

## Polygon pours and split planes (outlines as drawn)
faz on Bottom Layer "NONET_L02_P003" (solid, shelved, pour order 3): 1.397,63.5 12.7,63.5 12.7,57.277 11.303,55.88 1.524,55.88 1.524,63.627
no net on Bottom Layer "NONET_L02_P001" (solid, pour order 1): 6.985,67.691

## Keep-outs
Keep-Out Layer:
  lines w1: 0,-0.381 0,22.86 0,67.945 0,85 150,85 150,0 0,0

## Other copper
Bottom Layer:
  region: 38.989,30.607 40.259,29.337 42.037,29.337 42.037,29.591 42.926,30.48 42.926,31.75 42.418,32.258 41.402,32.258 40.259,31.115 38.989,31.115
  region: 39.37,31.115
  region: 43.116,27.749 43.116,24.828 42.608,24.32 40.957,24.32 40.576,24.701 40.576,27.877
  region net vesp: 4.191,27.051 6.477,27.051 6.477,24.849 6.223,24.595 6.18,24.638 4.318,24.638
  region net q12: 15.748,67.945 16.256,68.453 20.32,68.453 15.748,63.647
  region net NetD1_1: 28.956,51.181 29.591,51.816 30.226,51.816 30.226,49.443 28.154,49.443
  region net VCC: 26.162,57.912 25.273,58.801 25.273,59.182 25.4,59.182 26.924,60.706 27.432,60.198 27.432,59.182 30.353,56.261 30.353,54.991 30.099,54.737 28.702,54.737 28.321,55.118 28.321,55.645
  region net q12: 20.955,67.945 20.955,64.643 18.923,62.611 16.51,62.103 16.764,68.453 20.447,68.453
  region net faz: 27.051,64.643 27.051,62.484 25.4,62.484 24.384,61.468 21.463,61.468 21.463,62.738 23.368,64.643
  region: 25.019,66.929
  region net faz: 28.067,62.584 28.067,67.945 27.559,68.453 22.86,68.453 22.307,67.9 22.307,62.402
  region: 25.4,63.373
  region net q11: 35.433,62.62 35.433,67.818 34.869,68.382 30.028,68.382 29.591,67.945 29.591,63.881 32.004,61.468 34.455,61.468
  region net nol: 41.783,59.69 41.783,58.293 36.83,63.246 36.83,67.945 37.338,68.453 42.164,68.453 42.672,67.945 42.672,59.309 42.545,59.309 41.688,60.166
  region net nol: 39.243,62.611
  region: 25.273,28.384 26.289,28.384 26.289,25.971 26.543,25.717 26.543,24.32 26.289,24.066 25.273,24.066 25.019,24.32 25.019,25.717 25.273,25.971
  region net rst: 27.432,28.384 28.448,28.384 28.448,25.971 28.702,25.717 28.702,24.32 28.448,24.067 27.432,24.066 27.178,24.321 27.178,25.717 27.432,25.971
  region net nol: 38.862,38.185 38.862,44.069 39.37,44.577 40.513,44.577 41.783,45.847 42.164,45.466 42.164,40.687 42.498,40.687 42.672,40.513 39.751,37.592
  region net faz: 26.035,54.356 26.035,54.61 25.654,54.229 25.654,53.213 25.019,53.213 24.511,52.705 21.082,52.705 19.939,53.848 19.939,55.245 22.225,57.531 24.003,57.531 26.035,55.499 26.035,54.229
  region net VCC: 13.97,55.372 17.589,55.372 17.59,56.07 20.066,58.42 20.256,59.88 20.256,60.642 19.241,60.642
  region net vesp: 5.207,53.975 3.683,54.864 3.683,46.736 6.35,49.403

## Text inside footprints (layer, text, board x,y; h text height)
Q1: Bottom Overlay "*" at 31.722,47.26 h1.27
Q2: Bottom Overlay "*" at 23.218,49.563 h1.27 r90
U4: Mechanical 13 "CUTOUT POLYGON" at 35.211,27.174 h0.25 r270; Mechanical 13 "ANTENNA AREA" at 35.719,27.174 h0.25 r270